# Altium PCB MA600 Breakout v3.PcbDoc
Units mm, origin at the board's own origin, x right, y up, seen from the top; angles counter-clockwise.
Board outline 26.04 x 14.6 mm, 2 copper layers (Top Layer, Bottom Layer); 13 components, 11 nets, 56 pads, 22 vias.
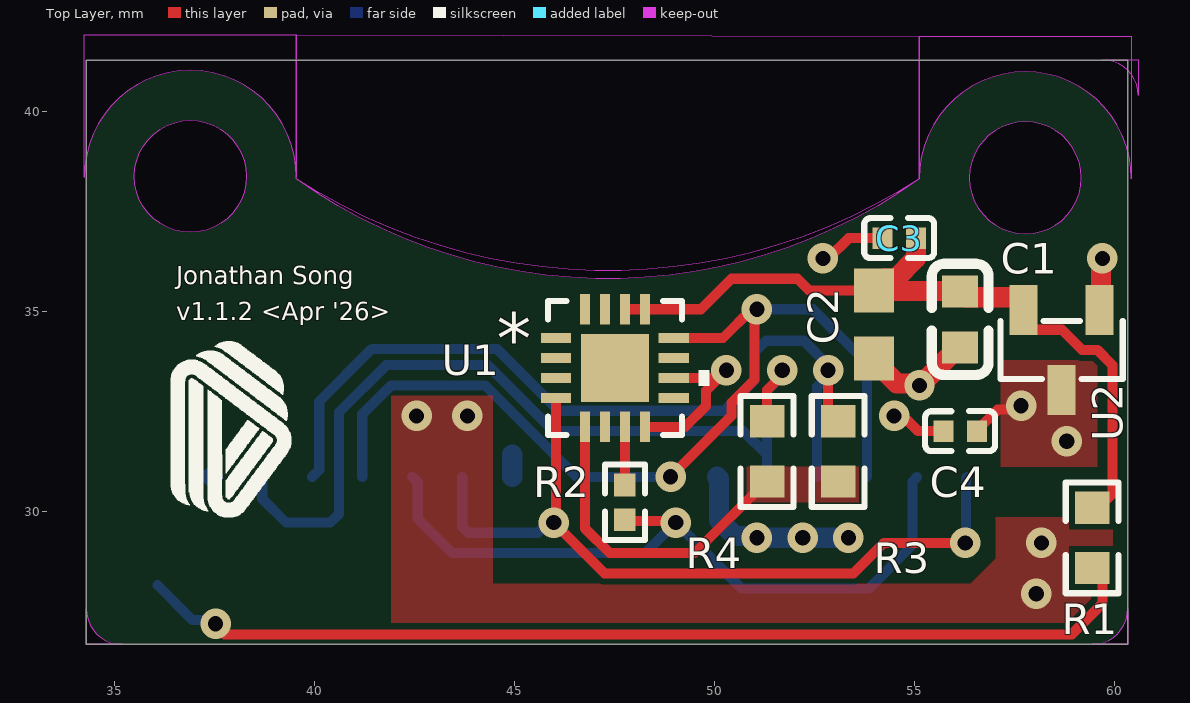
[diagram p0: Top Layer view]
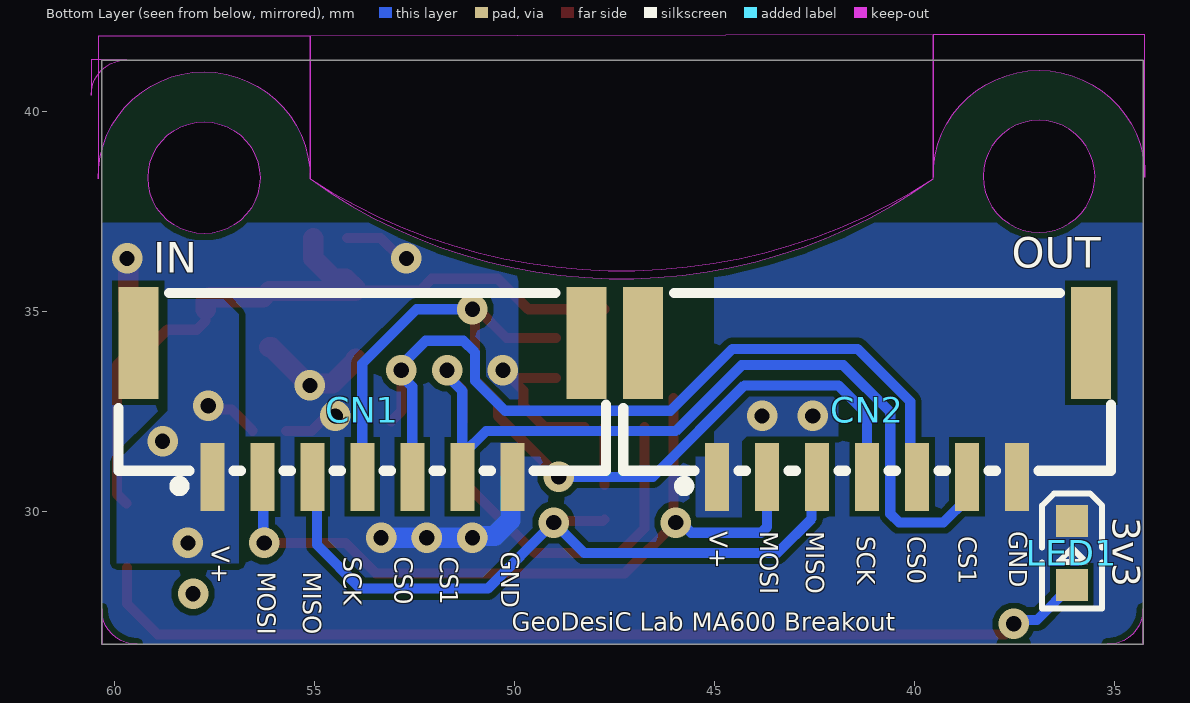
[diagram p1: Bottom Layer view, seen from below]

## Layer stack, top to bottom
Top Solder: solder mask 0.0102, Solder Resist, Dk 3.5
Top Layer: signal copper 0.0356
Dielectric 1: dielectric 0.32, FR-4, Dk 4.8
Bottom Layer: signal copper 0.0356
Bottom Solder: solder mask 0.0102, Solder Resist, Dk 3.5

## Board outline
34.29,26.67 60.325,26.67 60.325,41.275 34.29,41.275
cut-out: 39.54,38.312 39.54,41.91 55.114,41.875 55.114,38.312 cw(c47.327,49.2)
cut-out: 39.54,38.312 39.54,41.91 55.114,41.875 55.114,38.312 cw(c47.327,50.357)
cut-out: 59.436,26.67 ccw(c59.436,27.559) 60.325,27.559 60.325,26.67
cut-out: 34.29,27.559 ccw(c35.179,27.559) 35.179,26.67 34.29,26.67
cut-out: 55.114,38.312 55.114,41.875 60.414,41.875 60.414,38.316 ccw(c57.764,38.338)
cut-out: 34.24,38.347 34.24,41.91 39.54,41.91 39.54,38.352 ccw(c36.89,38.374)
cut-out: 60.588,40.395 ccw(c59.699,40.395) 59.699,41.284 60.588,41.284
cut-out: 56.364,38.338 ccw(c57.764,38.338) 57.764,36.938 ccw(c57.764,38.338) 59.164,38.338 ccw(c57.764,38.338) 57.764,39.738 ccw(c57.764,38.338)
cut-out: 36.89,36.974 cw(c36.89,38.374) 35.49,38.374 cw(c36.89,38.374) 36.89,39.774 cw(c36.89,38.374) 38.29,38.374 cw(c36.89,38.374)
cut-out: 57.023,43.688 ccw(c57.023,42.799) 56.134,42.799 56.134,43.688
cut-out: 38.735,42.799 ccw(c37.846,42.799) 37.846,43.688 38.735,43.688
cut-out: 31.289,41.529 26.035,41.529 26.035,46.783 ccw(c31.289,46.783)

## Design rules (kind name [scope] priority, off if disabled: settings)
Clearance [All] p1: gap=0.152 ignorepadtopadclearanceinfootprint=TRUE
PlaneConnect [All] p1: planeconnectstyle=Direct reliefexpansion=0.508 reliefentries=4 reliefconductorwidth=0.254 reliefairgap=0.254
PolygonConnect [All] p1: connectstyle=Direct reliefconductorwidth=0.254 reliefentries=4 polygonreliefangle="90 Angle" airgapwidth=0.254
RoutingVias [All] p1: holewidth=0.711 width=1.27 viastyle="Through Hole" minholewidth=0.711 minwidth=1.27 maxholewidth=0.711 maxwidth=1.27
SolderMaskExpansion [All] p1: expansion=0.102 istentingtop=FALSE
SupplyNets "Schematic Supply Nets_2" [InNet('3v3')] p1: voltage=0.000
SupplyNets "Schematic Supply Nets" [InNet('GND')] p2: voltage=0.000
Width [All] p1: maxlimit=2.54 minlimit=0.152 preferedwidth=0.254
29 further rules are at their usual default settings.

## Classes and differential pairs
component class "MA600 Breakout": C1 C2 C3 C4 CN2 LED1 R1 R2 R3 R4 U1 U2

## Components (designator, comment, footprint, x,y, rotation, side; value= is the part's Value field where it differs from the comment)
C1 "CL10A105KB8NNNC" C0603 56.134,34.798 r270 top value=1µF
C2 "C0603C104K5RACTU" CAPC1608X90 53.975,34.671 r270 top value=100nF
C3 "JLC_1uF_0402_CL05A105KA5NQNC" C0402 54.61,36.83 r0 top value=1µF
C4 "JLC_1uF_0402_CL05A105KA5NQNC" C0402 56.134,32.004 r0 top value=1µF
CN1 "JLC_7P_TOP_ENTRY_BM07B-GHS-TBT(LF)(SN)(N)" CONN-SMD_7P-P1.25_BM07B-GHS-TBT-LF-SN-N 53.808,32.536 r0 bottom
CN2 "JLC_7P_TOP_ENTRY_BM07B-GHS-TBT(LF)(SN)(N)" CONN-SMD_7P-P1.25_BM07B-GHS-TBT-LF-SN-N 41.188,32.536 r0 bottom
LED1 "BLUE_LED_JLC_KT-0603B" LED0603-RD 36.068,28.956 r270 bottom
R1 "JLC_0603WAF2051T5E" R0603 59.436,29.337 r270 top value=2.05k
R2 "JLC_22_0402WGF220JTCE" R0402 47.752,30.226 r90 top value=22
R3 "0 ohm_JLC_0603WAJ0000T5E" R0603 53.086,31.496 r270 top value=0
R4 "0 ohm_JLC_0603WAJ0000T5E" R0603 51.308,31.496 r270 top value=0
U1 "MA600GQE-0000-P" QFN-16_MA600_MNP 47.502,33.581 r0 top
U2 "JLC_LDO_XC6206-3.3V" SOT-23-3_L2.9-W1.3-P0.95-LS2.4-BR 58.674,34.036 r90 top

## Footprints (in the part's own frame and the unit in brackets; to place one, negate y for a bottom-side part, rotate by r counter-clockwise, add the part's x,y. Pads: shape width x height; smd on the part's side, far side on the other; paste and mask are expansions set on the pad)
C0402 [mm]
  rect 0.5x0.54 smd: 1(-0.42,0) 2(0.42,0)
  silkscreen extent -0.87,-0.5 0.87,0.5
C0603 [mm]
  rect 0.8x0.9 smd: 1(-0.7,0) 2(0.7,0)
  silkscreen extent -1.39,-0.71 1.39,0.71
CAPC1608X90 [mm]
  rect 1.1x1 smd: 1(-0.85,0) 2(0.85,0)
  body extent -0.8,-0.4 0.8,0.4, height 0.95
CONN-SMD_7P-P1.25_BM07B-GHS-TBT-LF-SN-N [mm]
  rect 0.6x1.7 smd: 1(3.75,1.675) 2(2.5,1.675) 3(1.25,1.675) 4(0,1.675) 5(-1.25,1.675) 6(-2.5,1.675) 7(-3.75,1.675)
  rect 1x2.8 smd: 8(-5.6,-1.675) 9(5.6,-1.675)
  silkscreen extent -6.1,-2.92 6.1,2.03
LED0603-RD [mm]
  rect 0.8x0.8 smd: 1(-0.799,0) 2(0.799,0)
  silkscreen extent -1.49,-0.75 1.39,0.76
QFN-16_MA600_MNP [mm]
  rect 0.757x0.255 smd paste+0 mask+0: 1(-1.471,0.75) 2(-1.471,0.25) 3(-1.471,-0.25) 4(-1.471,-0.75) 9(1.471,-0.75) 10(1.471,-0.25) 11(1.471,0.25) 12(1.471,0.75)
  rect 0.255x0.757 smd paste+0 mask+0: 5(-0.75,-1.471) 6(-0.25,-1.471) 7(0.25,-1.471) 8(0.75,-1.471) 13(0.75,1.471) 14(0.25,1.471) 15(-0.25,1.471) 16(-0.75,1.471)
  rect 1.7x1.7 smd paste+0 mask+0: 17(0,0)
  silkscreen extent -1.68,-1.68 2.36,1.68, body extent -1.55,-1.55 1.55,1.55, height 0.94
R0402 [mm]
  rect 0.566x0.54 smd paste-100 mask+0.051: 1(-0.433,0) 2(0.433,0)
  silkscreen extent -0.94,-0.5 0.94,0.5
R0603 [mm]
  rect 0.806x0.864 smd paste-100 mask+0.051: 1(-0.753,0) 2(0.753,0)
  silkscreen extent -1.39,-0.66 1.39,0.66
SOT-23-3_L2.9-W1.3-P0.95-LS2.4-BR [mm]
  rect 1.25x0.7 smd: 1(1,-0.95) 2(1,0.95) 3(-1,0)
  silkscreen extent -0.73,-1.53 0.73,1.53

## Part data
C1: library part CMP-001-00100-1, JLCPCB Part Class="Basic Part", LCSC Part Name="1uF ±10% 50V", Manufacturer=SAMSUNG(三星), Temperature Coefficient=X5R, Tolerance=10%, Voltage Rating=50V, Add into BOM=yes, Convert to PCB=yes, Datasheet=https://item.szlcsc.com/datasheet/CL10A105KB8NNNC/16531.html, Design Item ID=CL10A105KB8NNNC, Device=CL10A105KB8NNNC, Manufacturer Part=CL10A105KB8NNNC, Source=CL10A105KB8NNN_1uF.SCHLIB, Supplier Footprint=0603, Supplier Part=C15849, Symbol=CL10A105KB8NNNC
C2: library part CMP-001-00085-1, "0.1 ÂµF Â±10% 50V Ceramic Capacitor X7R 0603 (1608 Metric)", Case/Package="603-2 KEMET", Check_prices=https://www.snapeda.com/parts/C0603C104K5RACTU/KEMET/view-part/?ref=eda, Component Type=Standard, Design Item ID=C0603C104K5RACTU, MF=KEMET, MP=C0603C104K5RACTU, Pins=2, SnapEDA_Link=https://www.snapeda.com/parts/C0603C104K5RACTU/KEMET/view-part/?ref=snap, Source=C0603C104K5RACTU.SchLib
C3 C4: library part CMP-001-00121-1, "1uF 25V X5R ±10% 0402 Multilayer Ceramic Capacitors MLCC - SMD/SMT ROHS", JLCPCB Part Class="Basic Part", LCSC Part Name="1uF ±10% 25V", Manufacturer=SAMSUNG(三星), Manufacturer Part=CL05A105KA5NQNC, Temperature Coefficient=X5R, Tolerance=10%, Voltage Rating=25V, Add into BOM=yes, Convert to PCB=yes, Datasheet=https://item.szlcsc.com/datasheet/CL05A105KA5NQNC/53938.html, Design Item ID=JLC_1uF_0402_CL05A105KA5NQNC, Device=CL05A105KA5NQNC, Source=CL05A105KA5NQNC1_CL05A105KA5NQNC.SCHLIB, Supplier Footprint=0402, Supplier Part=C52923, Symbol=CL05A105KA5NQNC
CN1 CN2: library part CMP-001-00120-1, "-25℃~+85℃ 1 1.25mm 12mm 1A 1x7P 4.05mm 4.32mm 50V 7 7P Auxiliary Solder Pin GH PA9T Phosphor bronze Surface Mount,Vertical Tin UL94V-0 White SMD,P=1.25mm Wire To Board Connector ROHS", Colour=White, Current Rating (Max)=1A, Flame Retardant Rating=UL94V-0, JLCPCB Part Class="Extended Part", LCSC Part Name="1x7P 间距:1.25mm 立贴 系列:GH", Manufacturer=JST, Manufacturer Part=BM07B-GHS-TBT(LF)(SN)(N), Operating Temperature Range=-25℃~+85℃, Rated Voltage (Max)=50V, Add into BOM=yes, Contact Material="Phosphor Bronze", Contact Plating=Tin, Convert to PCB=yes, Datasheet=https://atta.szlcsc.com/upload/public/pdf/source/20190411/C378970_7BCD15E79143F499DF63A80CF437C3FA.pdf, Design Item ID=JLC_7P_TOP_ENTRY_BM07B-GHS-TBT(LF)(SN)(N), Device=BM07B-GHS-TBT(LF)(SN)(N), Mounting Style="Standing paste", Number of PINs Per Row=7, Number of Rows=1, Pins=7P, Pins Structure=1x7P, Pitch=1.25mm, Plastic Material=PA9T, Reference Series=GH, Row Spacing=-, Source=BM07B-GHS-TBT(LF)(SN)(N)1_BM07B-GHS-TBT(LF)(SN)(N).SCHLIB, Supplementary Features="Auxiliary soldering legs", Supplier Footprint=SMD,P=1.25mm, Supplier Part=C378970, Symbol=BM07B-GHS-TBT(LF)(SN)(N), X-Length of Bottom Edge on Board (Spacing Line)=12mm, Y-Width of Bottom Edge on Board=4.32mm, Z-Height of the Board=4.05mm
LED1: library part CMP-007-00036-1, "100mW 120° 175mcd 3.1V 460nm~475nm 469nm 5mA Blue Water Clear 0603 LED Indication - Discrete ROHS", Color Temperature=-, Forward Current=5mA, Illumination Color=Blue, JLCPCB Part Class="Extended Part", LCSC Part Name="0603 蓝灯 高亮", Lens Color="Water Clear", Manufacturer=KENTO, Manufacturer Part=KT-0603B, Power(Watts)=100mW, Voltage - Forward(Vf)=3.1V, Add into BOM=yes, Convert to PCB=yes, Datasheet=https://item.szlcsc.com/datasheet/KT-0603B/2661.html, Design Item ID=BLUE_LED_JLC_KT-0603B, Device=KT-0603B, Diode Configuration=-, Luminous Intensity=175mcd, Mounting Style=-, Operating Temperature=-, Peak Wavelength=469nm, Source="Blue_LED_JLC_Blue light 06031.SCHLIB", Supplier Footprint=0603, Supplier Part=C2288, Symbol="Blue light 0603", Viewing Angle=120°, Wavelength - Dominant=460nm~475nm
R1: library part CMP-009-00217-1, "-55℃~+155℃ 100mW 2.05kΩ 75V Thick Film Resistor ±1% ±100ppm/℃ 0603 Chip Resistor - Surface Mount ROHS", JLCPCB Part Class="Extended Part", LCSC Part Name="2.05kΩ ±1% 100mW 厚膜电阻", Manufacturer=UNI-ROYAL(厚声), Manufacturer Part=0603WAF2051T5E, Operating Temperature=-55℃~+155℃, Power(Watts)=100mW, Temperature Coefficient=±100ppm/℃, Tolerance=1%, Voltage-Supply(Max)=75V, Add into BOM=yes, Convert to PCB=yes, Datasheet=https://item.szlcsc.com/datasheet/0603WAF2051T5E/23627.html, Design Item ID=JLC_0603WAF2051T5E, Device=0603WAF2051T5E, Source=0603WAF2051T5E1_0603WAF2051T5E.SCHLIB, Supplier Footprint=0603, Supplier Part=C22900, Symbol=0603WAF2051T5E, Type="Thick Film Resistor"
R2: library part CMP-009-00220-2, "-55℃~+155℃ 22Ω 50V 62.5mW Thick Film Resistor ±1% ±100ppm/℃ 0402 Chip Resistor - Surface Mount ROHS", JLCPCB Part Class="Basic Part", LCSC Part Name="22Ω ±1% 62.5mW 厚膜电阻", Manufacturer=UNI-ROYAL(厚声), Manufacturer Part=0402WGF220JTCE, Operating Temperature Range=-55℃~+155℃, Temperature Coefficient=±100ppm/℃, Tolerance=1%, Add into BOM=yes, Convert to PCB=yes, Datasheet=https://atta.szlcsc.com/upload/public/pdf/source/20200306/C422600_1E6D84923E4A46A82E41ADD87F860B5C.pdf, Design Item ID=0402WGF220JTCE, Device=0402WGF220JTCE, Source=0402WGF220JTCE1_0402WGF220JTCE.SCHLIB, Supplier Footprint=0402, Supplier Part=C25092, Symbol=0402WGF220JTCE, Type="Thick Film Resistors"
R3 R4: library part CMP-009-00196-1, "0 ohm chip resistor 0603 -55℃~+155℃ 0Ω 100mW 75V Thick Film Resistor ±5% ±800ppm/℃ 0603 Chip Resistor - Surface Mount ROHS", JLCPCB Part Class="Extended Part", LCSC Part Name="0Ω ±5% 100mW 厚膜电阻", Manufacturer=UNI-ROYAL(厚声), Manufacturer Part=0603WAJ0000T5E, Operating Temperature=-55℃~+155℃, Power(Watts)=100mW, Temperature Coefficient=±800ppm/℃, Tolerance=5%, Voltage-Supply(Max)=75V, Add into BOM=yes, Convert to PCB=yes, Datasheet=https://item.szlcsc.com/datasheet/0603WAJ0000T5E/16080.html, Design Item ID="0 ohm_JLC_0603WAJ0000T5E", Device=0603WAJ0000T5E, Source="0 ohm_JLC_0603WAJ0000T5E1.SCHLIB", Supplier Footprint=0603, Supplier Part=C15402, Symbol=0603WAJ0000T5E, Type="Thick Film Resistor"
U1: library part CMP-319-000000-1, "QFN-16-EP(3x3) Magnetic Angle Sensors ROHS", Manufacturer_Name="Monolithic Power Systems", Copyright="Copyright (C) 2025 Ultra Librarian. All rights reserved.", Design Item ID=MA600GQE-0000-P, Manufacturer_Part_Number=MA600GQE-0000-P, RefDes=RefDes, Source=MA600GQE-0000-P_edited.SchLib, Type=Type
U2: library part CMP-340-000000-1, "-40℃~+125℃@(Tj) 1 1uA 250mA 3.3V 6V 75mV@(30mA) Fixed Over Current Protection、Short Circuit Protection Positive SOT-23 Voltage Regulators - Linear, Low Drop Out (LDO) Regulators ROHS", JLCPCB Part Class="Extended Part", LCSC Part Name="3.3V 250mA 6V", Manufacturer=YONGYUTAI(永裕泰), Manufacturer Part=XC6206-3.3V, Operating Temperature=-40℃~+125℃@(Tj), Output Current=250mA, Output Voltage=3.3V, Power Supply Rejection Ratio (PSRR)=-, standby current=1uA, Voltage - Supply=6V, Voltage Dropout=75mV@(30mA), Add into BOM=yes, Convert to PCB=yes, Datasheet=https://item.szlcsc.com/datasheet/XC6206-3.3V/3527846.html, Design Item ID=JLC_LDO_XC6206-3.3V, Device=XC6206-3.3V, Features="Over Current Protection；Short Circuit Protection", Noise=-, Number of Outputs=1, Output Configuration=Positive, Output Type=Fixed, Source=XC6206-3.3V_C30154841_XC6206-3.3V_C3015484.SCHLIB, Supplier Footprint=SOT-23, Supplier Part=C3015484, Symbol=XC6206-3.3V_C3015484

## Via types
v1: diameter 0.762, hole 0.381, Top Layer to Bottom Layer, 22 vias

## Nets (pads, with @x,y where several pads share a name; then routed paths per layer and width w, separated by ;. In a path a pad name is that pad's centre, name@x,y a point inside that pad or via, vN(x,y) a via of type N, cw(c..) or ccw(c..) an arc to the next point about the centre after c; other vN are vias at no path point)
3v3: C1.1 C2.1 C3.2 R1.1 U1.13 U1.14 U2.2 | length 18.9
  Top Layer w0.254: U1.14 U1.13 49.657,35.052 50.419,35.814 52.07,35.814 52.363,35.521 C2.1 ; U2.2 57.724,34.761 57.947,34.538 58.68,34.538 59.182,34.036 59.563,34.036 59.944,33.655 59.944,30.44 R1.1@59.706,30.202
  Top Layer w0.508: C2.1 53.986,35.51 56.123,35.51 C1.1 ; C2.1@53.975,35.571 54.221,35.817 54.525,35.817 55.03,36.322 C3.2 ; C1.1@56.28,35.352 57.628,35.352 57.724,35.256 U2.2
CS_0: CN1.5 CN2.5 R3.1 | length 21.5
  Top Layer w0.254: v1(52.832,33.528) 52.832,32.503 R3.1
  Bottom Layer w0.254: CN2.5 40.111,31.034 40.111,32.745 41.427,34.061 44.552,34.061 46.101,32.512 50.239,32.512 50.99,33.263 50.99,33.972 51.283,34.265 52.222,34.265 52.832,33.655 52.832,33.391 52.558,33.116 CN1.5
CS_1: CN1.6 CN2.6 R4.1 | length 21.7
  Top Layer w0.254: R4.1 51.308,33.034 51.689,33.415 v1(51.689,33.528)
  Bottom Layer w0.254: CN2.6 38.688,30.311 39.281,29.718 40.386,29.718 40.608,29.94 40.608,32.48 41.783,33.655 44.323,33.655 45.974,32.004 50.715,32.004 CN1.6@51.308,31.411 ; CN1.6 CN1.6@51.308,31.411 ; v1(51.689,33.528) 51.689,33.391 51.308,33.01 CN1.6@51.308,31.411
CS_X: R3.2 R4.2 U1.5 | length 8.1
  Top Layer w0.254: U1.5 46.752,29.575 47.371,28.956 49.493,28.956 51.279,30.743 R4.2
GND: C1.2 C2.2 C3.1 C4.1 CN1.7 CN2.7 LED1.1 U1.8 U1.10 U2.1 | length 15.6
  Top Layer w0.254: U1.8 49.255,32.11 49.784,32.639 49.784,33.02 v1(50.292,33.528) ; U1.10 49.958,33.331 ; v1(52.705,36.322) 52.841,36.322 53.349,36.83 C3.1 ; v1(54.483,32.385) 54.702,32.385 55.083,32.004 C4.1
  Top Layer w0.508: C2.2 53.975,33.771 54.55,33.196 55.069,33.196 v1(55.118,33.147) 55.133,33.147 56.084,34.098 C1.2 ; U2.1 59.657,35.069 59.657,36.289 v1(59.69,36.322)
  Bottom Layer w0.508: CN2.7 CN2.7@37.451,30.847 ; CN1.7 50.104,30.815 50.104,29.779 50.5,29.383 51.008,29.383 v1(51.054,29.337) v1(52.197,29.337) v1(53.34,29.337)
MISO: CN1.3 CN2.3 R2.1 | length 18.3
  Top Layer w0.254: R2.1 47.79,29.756 48.984,29.756 v1(49.022,29.718)
  Bottom Layer w0.254: CN2.3 42.574,30.725 42.574,29.816 43.434,28.956 48.26,28.956 v1(49.022,29.718) 50.673,28.067 53.848,28.067 54.942,29.161 54.942,30.745 CN1.3
MOSI: CN1.2 CN2.2 U1.4 | length 19.7
  Top Layer w0.254: v1(45.974,29.718) 47.244,28.448 53.467,28.448 54.229,29.21 v1(56.261,29.21) ; v1@46.031,29.661 U1.4
  Bottom Layer w0.254: CN2.2 43.688,29.613 43.837,29.464 45.583,29.464 45.837,29.718 v1(45.974,29.718) ; v1(56.261,29.21) 56.284,29.233 56.284,30.838 CN1.2
NetLED1_2: LED1.2 R1.2 | length 25.6
  Top Layer w0.254: v1@37.338,27.305 37.36,27.305 37.741,26.924 58.928,26.924 59.69,27.686 R1.2@59.69,28.592
  Bottom Layer w0.254: LED1.2 36.941,27.283 37.423,27.283 v1(37.52,27.186)
NetR2_2: R2.2 U1.7 | length 1.5
  Top Layer w0.254: R2.2 U1.7
SCK: CN1.4 CN2.4 U1.12 | length 24.1
  Top Layer w0.254: v1(48.895,30.861) 50.419,32.385 50.419,32.716 50.992,33.29 50.992,34.99 v1(51.054,35.052) 50.926,35.052 50.205,34.331 U1.12
  Bottom Layer w0.254: CN2.4 41.188,32.425 41.91,33.147 44.256,33.147 46.542,30.861 v1(48.895,30.861) ; v1(51.054,35.052) 52.451,35.052 53.808,33.695 CN1.4
VCC: C4.2 CN1.1 CN2.1 U2.3 | length 2.1
  Top Layer w0.254: C4.2 56.554,32.024 57.072,32.542 57.561,32.542 v1(57.658,32.639) v1@57.594,32.575
  Bottom Layer w0.254: CN2.1@44.884,30.808 CN2.1
  Bottom Layer w0.508: CN2.1 CN2.1@44.938,31.411
  other v1: 58.039,27.94 58.166,29.21 58.801,31.75 42.545,32.385 43.815,32.385
pads on no net: CN1.8 CN1.9 CN2.8 CN2.9 U1.1 U1.2 U1.3 U1.6 U1.9 U1.11 U1.15 U1.16 U1.17

## Polygon pours and split planes (outlines as drawn)
VCC on Top Layer "NONET_L-01_P-001" (solid, pour order 6): 57.15,33.782 57.15,31.115 59.563,31.115 59.563,33.782
VCC on Top Layer "NONET_L-01_P-001" (solid, pour order 5): 44.45,28.194 56.388,28.194 57.023,28.829 57.023,29.845 59.944,29.845 59.944,27.178 41.91,27.178 41.91,32.893 44.45,32.893
CS_X on Top Layer "NONET_L-01_P-001" (solid, pour order 0): 50.8,31.115 53.594,31.115 53.594,30.226 50.8,30.226
GND on Bottom Layer "NONET_L-01_P-001" (solid, pour order 7): 34.29,37.211 60.325,37.211 60.325,26.67 34.29,26.67
VCC on Bottom Layer "NONET_L-01_P-001" (solid, pour order 3): 56.896,34.925 57.277,35.306 58.674,35.306 58.674,32.512 59.944,31.242 59.944,28.702 56.896,28.702
VCC on Bottom Layer "NONET_L-01_P-001" (solid, pour order 4): 42.164,33.02 44.196,33.02 45.466,31.75 45.466,29.845 44.323,29.845 44.323,31.75 44.196,31.877 41.91,31.877 41.91,32.893

## Other copper
Bottom Layer:
  pour cut-out: 45.009,36.273 45.009,31.572 45.212,31.369 49.911,31.369 49.911,36.325

## Silkscreen, mask and mechanical layers (free items; w line width, h text height)
Top Overlay:
  drawing of 6 lines, arcs and shapes, not listed
  text "Jonathan Song" at 36.538,35.67 h0.44
  text "v1.1.2 <Apr '26>" at 36.538,34.781 h0.44
Bottom Overlay:
  drawing of 3 lines, arcs and shapes, not listed
  text "OUT" at 37.567,36.093 h0.76
  text "IN" at 59.03,35.966 h0.76
  text "3v3" at 35.052,29.845 h0.69 r90
  text "GND" at 37.63,29.502 h0.44 r90
  text "MISO" at 42.71,29.502 h0.44 r90
  text "MOSI" at 43.853,29.502 h0.44 r90
  text "V+" at 45.123,29.502 h0.44 r90
  text "CS1" at 38.9,29.375 h0.44 r90
  text "CS0" at 40.17,29.375 h0.44 r90
  text "SCK" at 41.44,29.375 h0.44 r90
  text "V+" at 57.569,29.121 h0.44 r90
  text "GND" at 50.33,28.994 h0.44 r90
  text "CS1" at 51.854,28.867 h0.44 r90
  text "CS0" at 52.997,28.867 h0.44 r90
  text "SCK" at 54.267,28.867 h0.44 r90
  text "MISO" at 55.283,28.486 h0.44 r90
  text "MOSI" at 56.426,28.486 h0.44 r90
  text "GeoDesiC Lab MA600 Breakout" at 50.076,27.013 h0.44
Mechanical 1:
  circle w0.254: c47.371,44.577 r8.808
  circle w0.254: c57.764,38.338 r1.4
  circle w0.254: c57.764,38.338 r2.5
  circle w0.254: c47.371,45.993 r9.979
  circle w0.254: c36.89,38.374 r1.4
  pour cut-out: 36.89,36.974 cw(c36.89,38.374) 35.49,38.374 cw(c36.89,38.374) 36.89,39.774 cw(c36.89,38.374) 38.29,38.374 cw(c36.89,38.374)
  lines w0.254: 38.735,43.688 56.134,43.688 ; 39.54,38.352 ccw(c36.89,38.374) 34.24,38.347 34.24,41.91 39.54,41.91 ; 47.371,35.814 47.371,45.593 ; 47.371,44.577 47.439,35.814 ; 60.371,41.875 55.114,41.875 ; 60.414,38.316 60.414,41.875 ; 39.54,41.91 39.54,38.312 ccw(c47.327,49.2) 55.114,38.312 55.114,41.875 ; 39.54,41.91 55.114,41.875 ; 30.235,44.568 ccw(c30.235,45.457) 31.124,45.457 31.124,44.568 30.235,44.568 ; 34.163,28.194 ccw(c35.052,28.194) 35.052,27.305 59.69,27.305 ccw(c59.69,28.194) 60.579,28.194 60.579,42.799 ccw(c59.69,42.799) 59.69,43.688 35.052,43.688 ccw(c35.052,42.799) 34.163,42.799 34.163,28.194

## Text inside footprints (layer, text, board x,y; h text height)
U1: Top Overlay "*" at 44.548,33.696 h1.27; Mechanical 13 "*" at 46.88,33.696 h1.27